# EAGLE board 555 timer blink (EAGLE 9.7.0)

Size 103.64 x 134.18 mm. Coordinates in mm from the lower left corner, seen from the top.
Outline: 0,0 103.64,0 103.64,134.18 0,134.18 0,0
Copper layers (1*16): Top 0.035mm / dielectric 1.5mm / Bottom 0.035mm
Design rules "default": minimum track width 6mil, minimum drill 0.35mm, track to track 6mil, track to pad 6mil, pad to pad 6mil, via to via 6mil, smd to smd 6mil, copper to edge 40mil, drill to drill 6mil, minimum pad ring 10mil, minimum via ring 8mil, stop-mask expansion 4mil, vias tented up to drill 0mil, thermal gap 10mil

## Footprints (pad centres in the part's own frame; a part is rotated, then mirrored left to right if it is on the bottom)
LEDRD254W60D565H860B = drill 0.981 pad 1.581: 1 -1.27,0; 2 1.27,0
ARDUINO-UNO-R3-SHIELD = drill 1.016 pad 1.88: 3.3V 24.13,-2.54; 5V 24.13,0; A0 24.13,12.7; A1 24.13,15.24; A2 24.13,17.78; A3 24.13,20.32; A4 24.13,22.86; A5 24.13,25.4; AREF -24.13,-13.97; D2 -24.13,20.32; D3 -24.13,17.78; D4 -24.13,15.24; D5 -24.13,12.7; D6 -24.13,10.16; D7 -24.13,7.62; D8 -24.13,3.81; D9 -24.13,1.27; D10 -24.13,-1.27; D11 -24.13,-3.81; D12 -24.13,-6.35; D13 -24.13,-8.89; GND@0 24.13,2.54; GND@1 24.13,5.08; GND@2 -24.13,-11.43; IOREF 24.13,-7.62; NC 24.13,-10.16; RES 24.13,-5.08; RX -24.13,25.4; SCL -24.13,-19.05; SDA -24.13,-16.51; TX -24.13,22.86; VIN 24.13,7.62

## Placement (x,y rotation side)
D1  RED  [LEDRD254W60D565H860B]  58.47,125.85 180 top
D2  RED  [LEDRD254W60D565H860B]  67.43,125.99 180 top
D3  RED  [LEDRD254W60D565H860B]  76.53,126.13 180 top
D4  RED  [LEDRD254W60D565H860B]  85.08,126.27 180 top
D5  RED  [LEDRD254W60D565H860B]  95.97,126.27 180 top
D6  RED  [LEDRD254W60D565H860B]  58.28,114.82 180 top
D7  RED  [LEDRD254W60D565H860B]  68.49,114.95 180 top
D8  RED  [LEDRD254W60D565H860B]  77.59,115.09 180 top
D9  RED  [LEDRD254W60D565H860B]  86.14,115.23 180 top
D10  RED  [LEDRD254W60D565H860B]  96.48,115.37 180 top
D11  RED  [LEDRD254W60D565H860B]  59.25,103.78 180 top
D12  RED  [LEDRD254W60D565H860B]  69.59,104.34 180 top
D13  RED  [LEDRD254W60D565H860B]  78.69,104.47 180 top
D14  RED  [LEDRD254W60D565H860B]  87.24,104.61 180 top
D15  RED  [LEDRD254W60D565H860B]  96.76,104.61 180 top
D16  RED  [LEDRD254W60D565H860B]  58.97,94.13 180 top
D17  RED  [LEDRD254W60D565H860B]  71.11,94.27 180 top
D18  RED  [LEDRD254W60D565H860B]  80.21,94.41 180 top
D19  RED  [LEDRD254W60D565H860B]  88.76,94.54 180 top
D20  RED  [LEDRD254W60D565H860B]  97.31,94.68 180 top
D21  RED  [LEDRD254W60D565H860B]  58.97,82.96 180 top
D22  RED  [LEDRD254W60D565H860B]  70.69,82.69 180 top
D23  RED  [LEDRD254W60D565H860B]  79.8,82.82 180 top
D24  RED  [LEDRD254W60D565H860B]  88.34,82.96 180 top
D25  RED  [LEDRD254W60D565H860B]  97.58,82.82 180 top
U1  ARDUINO-UNO-R3-SHIELD  [ARDUINO-UNO-R3-SHIELD]  47.88,29.84 270 top

## Library data of the parts
D1-D25 = Tinkercad; CATEGORY: Opto-Electronic; SUB-CATEGORY: LED; VALUE: LED_RED
U1 = Tinkercad

## Nets
U1_D2: D4.1 D9.1 D14.1 D19.1 D24.1 U1.D2
U1_D3: D3.1 D8.1 D13.1 D18.1 D23.1 U1.D3
U1_D4: D2.1 D7.1 D12.1 D17.1 D22.1 U1.D4
U1_D5: D1.1 D6.1 D11.1 D16.1 D21.1 U1.D5
U1_D6: D21.2 D22.2 D23.2 D24.2 D25.2 U1.D6
U1_D7: D16.2 D17.2 D18.2 D19.2 D20.2 U1.D7
U1_D8: D11.2 D12.2 D13.2 D14.2 D15.2 U1.D8
U1_D9: D6.2 D7.2 D8.2 D9.2 D10.2 U1.D9
U1_D10: D1.2 D2.2 D3.2 D4.2 D5.2 U1.D10
U1_TX: D5.1 D10.1 D15.1 D20.1 D25.1 U1.TX

## Tracks (layer width: path | path; a pad name or v marks a point on that pad's centre or on a via)
U1_D2  (5 unrouted)
U1_D3  (5 unrouted)
U1_D4  (5 unrouted)
U1_D5  (5 unrouted)
U1_D6  (5 unrouted)
U1_D7  (5 unrouted)
U1_D8  (5 unrouted)
U1_D9  (5 unrouted)
U1_D10  (5 unrouted)
U1_TX  (5 unrouted)